# EAGLE board Brine BRD v89 (EAGLE 9.7.0), part 1 of 4
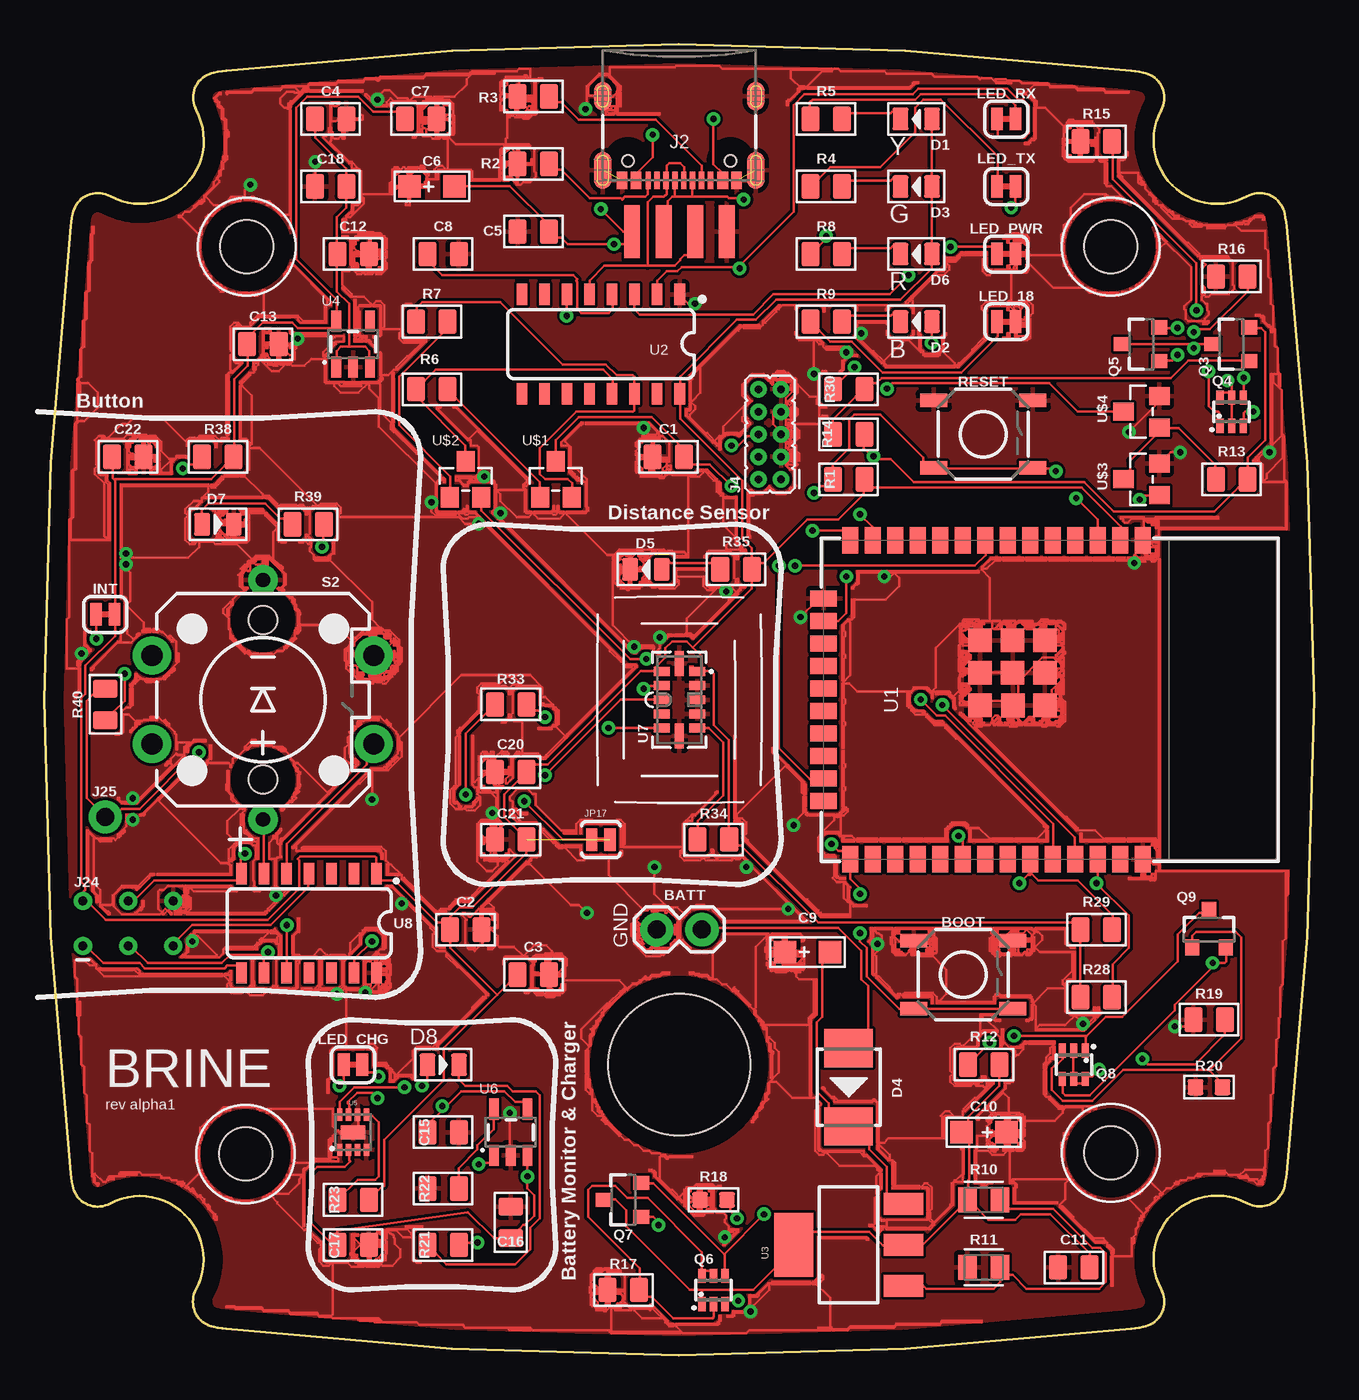
[diagram p0: board, top side]
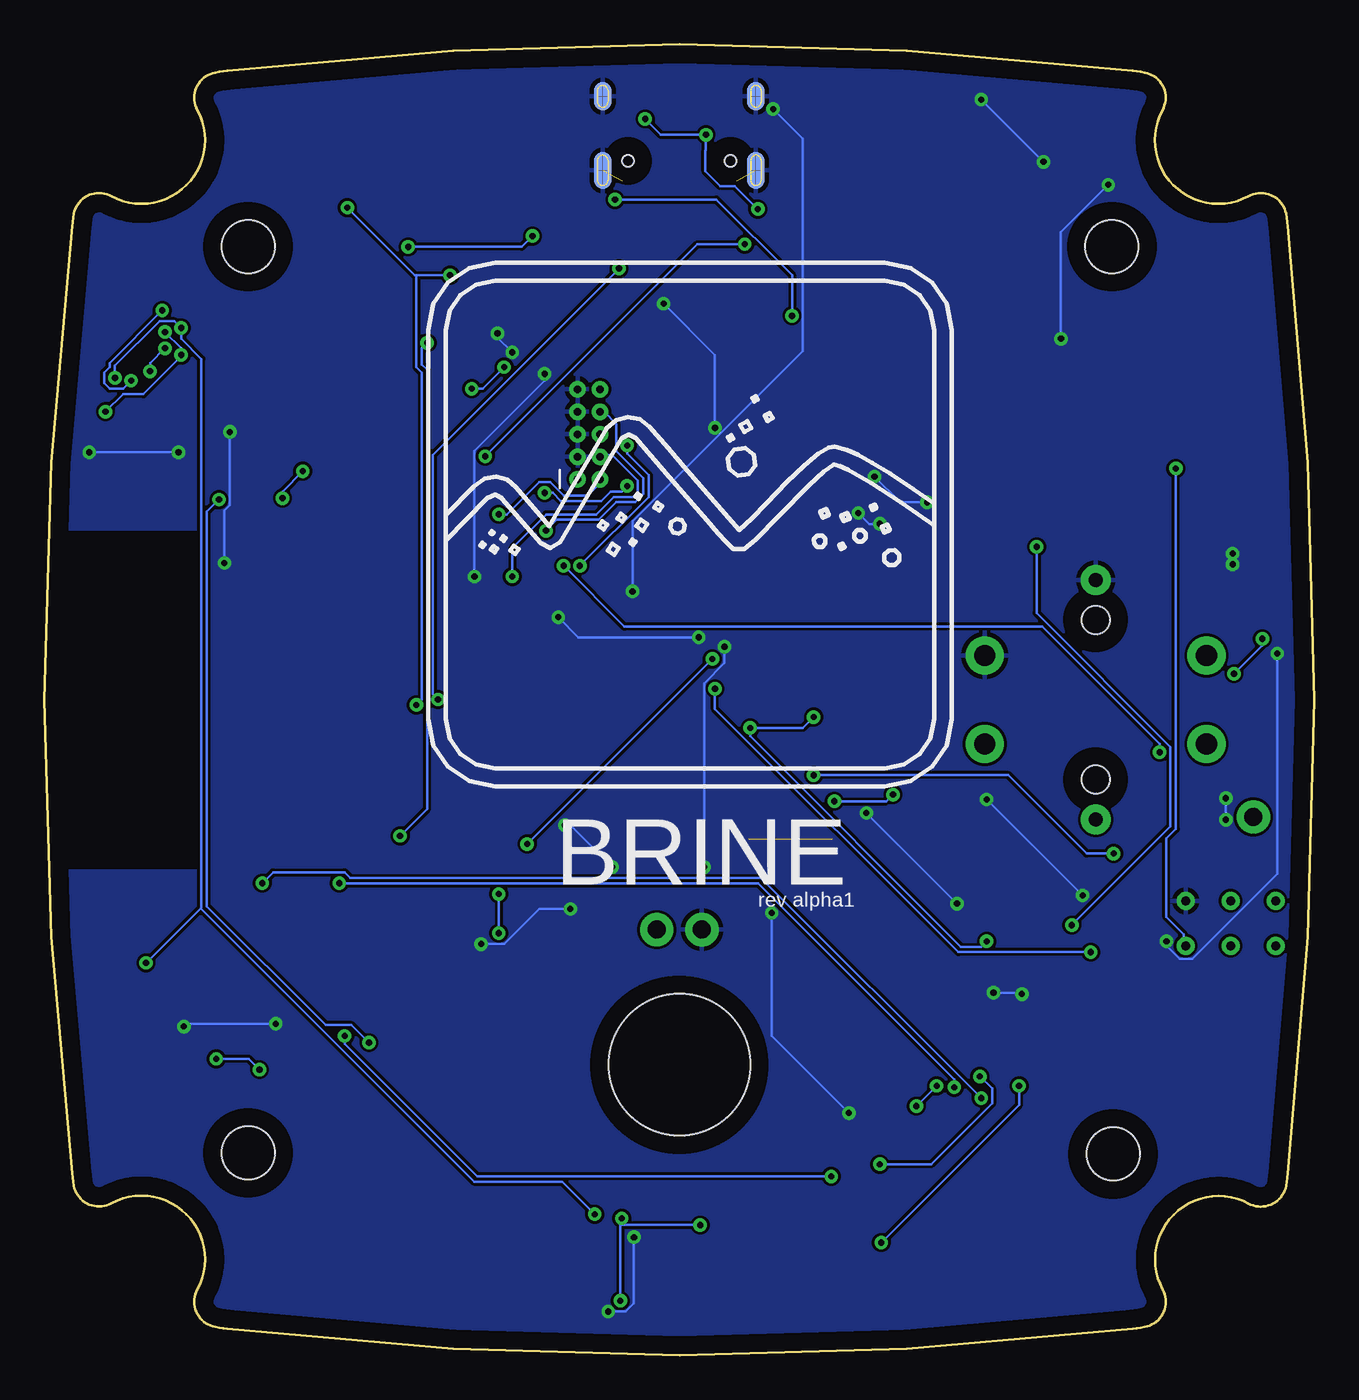
[diagram p1: board, bottom side, seen from below]

Size 71.6 x 73.93 mm. Coordinates in mm from the lower left corner, seen from the top.
Outline: 70.04,10.25 arc13 70.04,63.68 arc4 69.94,64.37 arc108 67.83,65.37 arc-147 62.97,70.23 arc108 61.97,72.34 arc4 61.28,72.44 arc13 10.25,72.44 arc4 9.56,72.34 arc108 8.56,70.23 arc-147 3.71,65.37 arc108 1.6,64.37 arc4 1.49,63.69 arc13 1.49,10.24 arc4 1.59,9.56 arc108 3.7,8.55 arc-147 8.55,3.7 arc108 9.56,1.59 arc4 10.25,1.49 arc13 61.28,1.49 arc4 61.97,1.59 arc108 62.97,3.71 arc-147 67.83,8.56 arc108 69.94,9.56 arc4 70.04,10.25
Copper layers (1*16): Top 0.035mm / dielectric 1.5mm / Bottom 0.035mm
Design rules "Fusion Electronics Design Rules": minimum track width 6mil, minimum drill 0.35mm, track to track 6mil, track to pad 6mil, pad to pad 6mil, via to via 6mil, smd to smd 6mil, copper to edge 40mil, drill to drill 6mil, minimum pad ring 10mil, minimum via ring 8mil, stop-mask expansion 4mil, vias tented up to drill 0mil, thermal gap 10mil
Holes 3 mm at 60.12,62.52 60.12,11.41 11.35,11.35 11.41,62.52
Holes 8 mm at 35.8,16.38
tRestrict: area 63,27.4 to 71.9,46.5
bRestrict: area 63,27.4 to 71.9,46.5

## Footprints (pad centres in the part's own frame; a part is rotated, then mirrored left to right if it is on the bottom)
1X02 = drill 1.016 pad 1.88: 1 0,0; 2 2.54,0
TACTILE_SWITCH_SMD_5.2MM = smd 1.524 x 0.762: 1 -2.794,1.905; 2 2.794,1.905; 3 -2.794,-1.905; 4 2.794,-1.905
C0805 = smd 1.397 x 1.016: 1 0,0.889; 2 0,-0.889
AVX-A = smd 1.27 x 1.27: + -1.27,0; - 1.27,0
LED-0805 = smd 0.889 x 1.27: + -0.889,0; - 0.889,0
DO-214AA = smd 2.159 x 2.743: + -2.21,0; - 2.21,0
SMT-JUMPER_2_NC_TRACE_SILK = smd 0.66 x 1.27: 1 -0.521,0; 2 0.521,0
USB-C-16P-4LAYER-ISOLATED = smd 0.3 x 1: A5 -1.25,-0.34; A6 -0.25,-0.34; A7 0.25,-0.34; A8 1.25,-0.34; B5 1.75,-0.34; B6 0.75,-0.34; B7 -0.75,-0.34; B8 -1.75,-0.34 | smd 0.6 x 1: GND -3.225,-0.34; GND2 3.225,-0.34; VBUS1 -2.45,-0.34; VBUS2 2.45,-0.34 | smd 1 x 2.1: SHLD1 -4.32,-0.915; SHLD2 4.32,-0.915 | smd 1 x 2.1 bottom: SHLD3 -4.32,-0.915; SHLD4 4.32,-0.915 | smd 1 x 1.6: SHLD5 -4.32,-5.095; SHLD8 4.32,-5.095 | smd 1 x 1.6 bottom: SHLD6 -4.32,-5.095; SHLD7 4.32,-5.095 | hole 0.65: -2.89,-1.445; 2.89,-1.445
USB-SOLDER-PADS = smd 3 x 0.9: D+ 0,-0.889; D- 0,0.889; GND 0,-2.667; VBUS 0,2.667
2X5_PTH_SILK_.05 = drill 0.432: 1 0,0; 2 0,1.27; 3 1.27,0; 4 1.27,1.27; 5 2.54,0; 6 2.54,1.27; 7 3.81,0; 8 3.81,1.27; 9 5.08,0; 10 5.08,1.27
2X3_TEST_POINTS = drill 0.508: 1 -2.54,-1.27; 2 -2.54,1.27; 3 0,-1.27; 4 0,1.27; 5 2.54,-1.27; 6 2.54,1.27
1X01_NO_SILK = drill 1.016 pad 1.88: 1 0,0
PAD-JUMPER-2-NC_BY_TRACE_YES_SILK = smd 0.635 x 1.27: 1 -0.508,0; 2 0.508,0
SOT23-3 = smd 0.8 x 0.9: 1 -0.95,-1; 2 0.95,-1; 3 0,1.1
SOT363_PHILIPS = smd 0.4 x 0.8: 1 -0.65,-0.8; 2 0,-0.8; 3 0.65,-0.8; 4 0.65,0.8; 5 0,0.8; 6 -0.65,0.8
R0805 = smd 1.397 x 1.016: 1 0,0.889; 2 0,-0.889
RESC2012X65 = smd 1.031 x 1.42: 1 -0.919,0; 2 0.919,0
R0603 = smd 0.889 x 0.889: 1 0,0.762; 2 0,-0.762
TACTILE_SWITCH_LED_PTH_12MM = drill 1.2 pad 2.159: 1 -6.25,2.5; 2 6.25,2.5; 3 -6.25,-2.5; 4 6.25,-2.5 | drill 0.8 pad 1.676: A 0,-6.75; C 0,6.75 | hole 1.6: 0,4.5; 0,-4.5
ESP-WROOM-32D = smd 0.9 x 1.5: 1 6.43,9; 2 5.16,9; 3 3.89,9; 4 2.62,9; 5 1.35,9; 6 0.08,9; 7 -1.19,9; 8 -2.46,9; 9 -3.73,9; 10 -5,9; 11 -6.27,9; 12 -7.54,9; 13 -8.81,9; 14 -10.08,9; 25 -10.08,-9; 26 -8.81,-9; 27 -7.54,-9; 28 -6.27,-9; 29 -5,-9; 30 -3.73,-9; 31 -2.46,-9; 32 -1.19,-9; 33 0.08,-9; 34 1.35,-9; 35 2.62,-9; 36 3.89,-9; 37 5.16,-9; 38 6.43,-9 | smd 1.5 x 0.9: 15 -11.57,5.715; 16 -11.57,4.445; 17 -11.57,3.175; 18 -11.57,1.905; 19 -11.57,0.635; 20 -11.57,-0.635; 21 -11.57,-1.905; 22 -11.57,-3.175; 23 -11.57,-4.445; 24 -11.57,-5.715 | smd 1.33 x 1.33: GND -0.912,1.531; GNDT1 -2.751,3.346; GNDT2 -2.761,1.516; GNDT3 -2.751,-0.314; GNDT4 -0.891,-0.324; GNDT5 0.909,-0.314; GNDT6 0.909,1.516; GNDT7 0.909,3.346; GNDT8 -0.921,3.346
SO016 = smd 0.6 x 1.2: 1 -4.445,-2.8; 2 -3.175,-2.8; 3 -1.905,-2.8; 4 -0.635,-2.8; 5 0.635,-2.8; 6 1.905,-2.8; 7 3.175,-2.8; 8 4.445,-2.8; 9 4.445,2.8; 10 3.175,2.8; 11 1.905,2.8; 12 0.635,2.8; 13 -0.635,2.8; 14 -1.905,2.8; 15 -3.175,2.8; 16 -4.445,2.8
SOT223 = smd 1.219 x 2.235: 1 -2.311,-3.099; 2 0,-3.099; 3 2.311,-3.099 | smd 3.6 x 2.2: 4 0,3.099
SOT23-5 = smd 0.55 x 1.2: 1 -0.95,-1.3; 2 0,-1.3; 3 0.95,-1.3; 4 0.95,1.3; 5 -0.95,1.3
DFN-8 = smd 0.3 x 0.7: 1 -0.75,-0.99; 2 -0.25,-0.99; 3 0.25,-0.99; 4 0.75,-0.99; 5 0.75,0.99; 6 0.25,0.99; 7 -0.25,0.99; 8 -0.75,0.99 | smd 1.38 x 0.8: 9 0,0
VL53L1X = smd 0.5 x 0.9: 1 1.6,-1; 2 0.8,-1; 3 0,-1; 4 -0.8,-1; 5 -1.6,-1; 7 -1.6,1; 8 -0.8,1; 9 0,1; 10 0.8,1; 11 1.6,1 | smd 1.4 x 0.5: 6 -2.05,0; 12 2.05,0
SO14 = smd 0.6 x 1.2: 1 -3.81,-2.8; 2 -2.54,-2.8; 3 -1.27,-2.8; 4 0,-2.8; 5 1.27,-2.8; 6 2.54,-2.8; 7 3.81,-2.8; 8 3.81,2.8; 9 2.54,2.8; 10 1.27,2.8; 11 0,2.8; 12 -1.27,2.8; 13 -2.54,2.8; 14 -3.81,2.8
SOT-23 = smd 1.016 x 1.143: 1 -0.889,-1.016; 2 0.889,-1.016; 3 0,1.016

## Placement (x,y rotation side)
BATT  [1X02]  34.53,24 0 top
BOOT  GPIO0  [TACTILE_SWITCH_SMD_5.2MM]  51.81,21.46 0 top
C1  100nf  [C0805]  35.19,50.67 270 top
C2  100nf  [C0805]  23.76,24 90 top
C3  100nf  [C0805]  27.57,21.46 90 top
C4  100nf  [C0805]  16.14,69.72 90 top
C5  0.1uF  [C0805]  27.57,63.37 270 top
C6  10uF  [AVX-A]  21.85,65.91 0 top
C7  0.1uF  [C0805]  21.22,69.72 90 top
C8  10nF  [C0805]  22.49,62.1 90 top
C9  47uf  [AVX-A]  43.04,22.73 0 top
C10  10uf  [AVX-A]  52.97,12.57 180 top
C11  100nf  [C0805]  58.05,4.95 270 top
C12  100nf  [C0805]  17.41,62.1 90 top
C13  100nf  [C0805]  12.33,57.02 90 top
C15  4.7uf  [C0805]  22.49,12.57 90 top
C16  4.7uf  [C0805]  26.3,7.49 180 top
C17  0.1UF  [C0805]  17.41,6.22 90 top
C18  100nf  [C0805]  16.14,65.91 270 top
C20  0.1uF  [C0805]  26.3,32.89 270 top
C21  4.7uF  [C0805]  26.3,29.08 270 top
C22  100nF  [C0805]  4.71,50.67 90 top
D1  YELLOW-0805  [LED-0805]  49.16,69.72 180 top
D2  CLEAR-BLUE-0805  [LED-0805]  49.16,58.29 180 top
D3  GREEN-0805  [LED-0805]  49.16,65.91 180 top
D4  28V-5A  [DO-214AA]  45.35,15.11 270 top
D5  RED-0805  [LED-0805]  33.92,44.32 180 top
D6  RED-0805  [LED-0805]  49.16,62.1 180 top
D7  RED-0805  [LED-0805]  9.79,46.86 0 top
D8  YELLOW-0805  [LED-0805]  22.49,16.38 0 top
INT  JUMPER-SMT_2_NC_TRACE_SILK  [SMT-JUMPER_2_NC_TRACE_SILK]  3.44,41.78 0 top
J2  USB-C  [USB-C-16P-4LAYER-ISOLATED]  35.8,65.91 180 top
J3  USB_SOLDER_PADS  [USB-SOLDER-PADS]  35.8,63.37 90 top
J4  [2X5_PTH_SILK_.05]  41.54,49.4 90 top
J24  ISP  [2X3_TEST_POINTS]  4.72,24.36 0 top
J25  [1X01_NO_SILK]  3.44,30.35 270 top
JP17  INT  [PAD-JUMPER-2-NC_BY_TRACE_YES_SILK]  31.38,29.08 0 top
LED_18  JUMPER-SMT_2_NC_TRACE_SILK  [SMT-JUMPER_2_NC_TRACE_SILK]  54.24,58.29 0 top
LED_CHG  JUMPER-SMT_2_NC_TRACE_SILK  [SMT-JUMPER_2_NC_TRACE_SILK]  17.41,16.38 0 top
LED_PWR  JUMPER-SMT_2_NC_TRACE_SILK  [SMT-JUMPER_2_NC_TRACE_SILK]  54.24,62.1 0 top
LED_RX  JUMPER-SMT_2_NC_TRACE_SILK  [SMT-JUMPER_2_NC_TRACE_SILK]  54.24,69.72 0 top
LED_TX  JUMPER-SMT_2_NC_TRACE_SILK  [SMT-JUMPER_2_NC_TRACE_SILK]  54.24,65.91 180 top
Q3  20V/4.2A/52mΩ/1.4W  [SOT23-3]  66.94,57.02 90 top
Q4  [SOT363_PHILIPS]  66.94,53.21 0 top
Q5  20V/4.2A/52mΩ/1.4W  [SOT23-3]  61.86,57.02 90 top
Q6  [SOT363_PHILIPS]  37.73,3.68 0 top
Q7  20V/4.2A/52mΩ/1.4W  [SOT23-3]  32.65,8.76 90 top
Q8  [SOT363_PHILIPS]  58.05,16.38 180 top
Q9  20V/4.2A/52mΩ/1.4W  [SOT23-3]  65.67,24 0 top
R1  10K  [R0805]  45.35,49.4 90 top
R2  1K  [R0805]  27.57,67.18 90 top
R3  1K  [R0805]  27.57,70.99 90 top
R4  1K  [R0805]  44.08,65.91 90 top
R5  1K  [R0805]  44.08,69.72 90 top
R6  10K  [R0805]  21.85,54.48 90 top
R7  10K  [R0805]  21.85,58.29 90 top
R8  2.2K  [R0805]  44.08,62.1 90 top
R9  4.7K  [R0805]  44.08,58.29 90 top
R10  240  [RESC2012X65]  52.97,8.76 180 top
R11  715  [RESC2012X65]  52.97,4.95 0 top
R12  10K  [R0805]  52.97,16.38 270 top
R13  10K  [R0805]  66.94,49.4 90 top
R14  10K  [R0805]  45.35,51.94 270 top
R15  10K  [R0805]  59.32,68.45 90 top
R16  1K  [R0805]  66.94,60.83 90 top
R17  1K  [R0805]  32.65,3.68 90 top
R18  1M  [R0603]  37.73,8.76 90 top
R19  1K  [R0805]  65.67,18.92 90 top
R20  1M  [R0603]  65.67,15.11 90 top
R21  1K  [R0805]  22.49,6.22 90 top
R22  2K  [R0805]  22.49,9.4 90 top
R23  10K  [R0805]  17.41,8.76 90 top
R28  2.2K  [R0805]  59.32,20.19 270 top
R29  1K  [R0805]  59.32,24 270 top
R30  100R  [R0805]  45.35,54.48 90 top
R33  10K  [R0805]  26.3,36.7 270 top
R34  10K  [R0805]  37.73,29.08 90 top
R35  1K  [R0805]  39,44.32 90 top
R38  10K  [R0805]  9.79,50.67 90 top
R39  1K  [R0805]  14.87,46.86 90 top
R40  10K  [R0805]  3.44,36.7 0 top
RESET  Reset  [TACTILE_SWITCH_SMD_5.2MM]  52.94,51.94 0 top
S2  Button  [TACTILE_SWITCH_LED_PTH_12MM]  12.33,36.97 0 top
U1  ESP-WROOM-3232D  [ESP-WROOM-32D]  55.51,36.97 0 top
U2  CH340C  [SO016]  31.38,57.02 180 top
U3  LM1117  [SOT223]  45.35,6.22 90 top
U4  XC6222B331MR-G  [SOT23-5]  17.41,57.02 0 top
U5  MAX17048  [DFN-8]  17.41,12.57 0 top
U6  MCP73831  [SOT23-5]  26.3,12.57 0 top
U7  VL53L1X  [VL53L1X]  35.8,36.97 90 top
U8  ATTINY84-ARDUINO  [SO14]  14.93,24.36 180 top
U$1  MMBT3904LT1G  [SOT-23]  28.84,49.4 0 top
U$2  MMBT3904LT1G  [SOT-23]  23.76,49.4 0 top
U$3  MMBT3904LT1G  [SOT-23]  61.86,49.4 90 top
U$4  MMBT3904LT1G  [SOT-23]  61.86,53.21 90 top

## Library data of the parts
BATT J3 J4 J24 J25 = SparkFun-Connectors
BOOT RESET = SparkFun-Switches; PROD_ID: SWCH-14139
C1-C4 C11-C13 C18 = OPL_Capacitor; MPN: CC0805KRX7R9BB104
C5 C7 C17 C20 C22 = OPL_Capacitor; MPN: CC0805KRX7R9BB104; VALUE: 100nf
C6 = OPL_Capacitor; MPN: TAJA106K010RNJ; VALUE: 10uf
C8 = OPL_Capacitor; MPN: CC0805JRX7R9BB103; VALUE: 10nf
C9 = OPL_Capacitor; MPN: TAJA476*006#NJ
C10 = OPL_Capacitor; MPN: TAJA106K016RNJ
C15 C16 = OPL_Capacitor; MPN: CC0805KKX5R8BB475
C21 = OPL_Capacitor; MPN: CC0805KKX5R8BB475; VALUE: 4.7uf
D1 D8 = OPL_Optoelectronics; MPN: 17-215UYC/S530-A3/TR8
D2 = OPL_Optoelectronics; MPN: EL-17-215/BHC-AN1P2/3T
D3 = OPL_Optoelectronics; MPN: 17-215SYGC/S530-E2/TR8
D4 = OPL_Discrete_Semiconductor; MPN: SS54B
D5-D7 = OPL_Optoelectronics; MPN: 17-215SURC/S530-A2/TR8
INT LED_18 LED_CHG LED_PWR LED_RX LED_TX = SparkFun-Jumpers
J2 = SparkFun-Connectors; PROD_ID: CONN-14122
JP17 = SparkFun-Passives
Q3 Q5 Q7 Q9 = SparkFun-DiscreteSemi; OPL: DMG2305UX-7; PROD_ID: TRANS-14388
Q4 Q6 Q8 = SparkFun-DiscreteSemi; PROD_ID: TRANS-14386
R1 R6 R7 R12-R15 R23 R33 R34 R38 R40 = OPL_Resistor; MPN: RC0805FR-0710KL
R2-R5 R16 R17 R19 R21 R29 R35 R39 = OPL_Resistor; MPN: RC0805JR-071KL
R8 R28 = OPL_Resistor; MPN: RC0805JR-072K2L
R9 = OPL_Resistor; MPN: RC0805JR-074K7L
R10 R11 = Tutorial - Fusion 360; CATEGORY: Resistor; SUB-CATEGORY: Fixed
R18 R20 = OPL_Resistor; MPN: RC0603FR-071ML
R22 = OPL_Resistor; MPN: RC0805JR-071KL; VALUE: 1K
R30 = OPL_Resistor; MPN: RC0805JR-07100RL
S2 = SparkFun-Switches; PROD_ID: SWCH-11758; SF_SKU: COM-10442
U1 = SparkFun-RF; OPL: ESP32-WROOM-32D(16MB); PROD_ID: IC-15676
U2 = SparkFun-IC-Comms; OPL: CH340C; PROD_ID: IC-14038
U3 = SparkFun-IC-Power; OPL: LM1117GSF-5.0; PROD_ID: VREG-08170
U4 = SparkFun-IC-Power; IOUT: 700mA; OPL: XC6220B331MR-G; PROD_ID: VREG-16775; VOUT: 3.3V
U5 = SparkFun-IC-Power; PROD_ID: IC-12551
U6 = SparkFun-IC-Power; PROD_ID: IC-09995
U7 = SparkFun-Sensors; OPL: VL53L1CXV0FY/1; PROD_ID: IC-13960
U8 = SparkFun-IC-Microcontroller; OPL: ATTINY84-20SSU; PROD_ID: IC-14155
U$1-U$4 = OPL_Discrete_Semiconductor; MPN: MMBT3904LT1G; OPL: MMBT3904LT1G

## Nets
3.3V: C2.1 C3.1 C7.1 C13.1 C20.1 C21.1 C22.1 D1.+ D3.+ D6.+ INT.2 J24.2 JP17.2 R1.2 R23.2 R28.2 R29.2 R34.2 R35.2 R38.2 U1.2 U2.16 U4.5 U7.1 U7.11 U8.1
5V [power]: C4.1 C12.1 C18.1 U4.1 U4.3
5V_CHG: C15.1 D8.+ U6.4
5V_EXT [power]: C10.- C11.1 Q6.1 Q7.3 R10.2 R12.1 U3.2 U3.4
5V_MEAS: Q4.4 Q5.2 Q6.4 Q7.2 Q8.4 Q9.2
!DTR!: R6.1 U2.13 U$2.3
!GAUGE_ALERT: U1.26
!GAUGE_ALERT!: R23.1 U5.5
!INT: R33.1 U7.7 U8.13
!RST: J24.5 R38.1 U8.4
!RTS!: R7.1 U2.14 U$1.2
!SHUT: R34.1 U7.5
ADR0: U8.3
ADR1: U8.2
ADR2: U8.12
ADR3: U8.11
CC1: J2.A5 R3.2
CC2: J2.B5 R2.2
D+: J2.A6 J2.B6 J3.D+ U2.5
D-: J2.A7 J2.B7 J3.D- U2.6
ESP32_0: BOOT.3 BOOT.4 U1.25 U$2.2
ESP32_ADC0: U1.4
ESP32_ADC3: U1.5
ESP32_ADC4: J25.1 R40.1 U1.8
ESP32_ADC5: U1.9
ESP32_ADC6: U1.6
ESP32_ADC7: U1.7
ESP32_EN: C1.1 R1.1 RESET.3 RESET.4 U1.3 U$1.3
ESP32_GPIO2: U1.24
ESP32_GPIO5_!CS!: U1.29
ESP32_GPIO12_TDI: J4.8 U1.14
ESP32_GPIO13_TCK: J4.4 U1.16
ESP32_GPIO14_TMS: J4.2 U1.13
ESP32_GPIO15_TDO: J4.6 U1.23
ESP32_GPIO16: U1.27
ESP32_GPIO17: U1.28
ESP32_GPIO18_SCK: D2.+ U1.30
ESP32_GPIO19_POCI: U1.31
ESP32_GPIO23_PICO: U1.37
ESP32_GPIO25: U1.10
ESP32_GPIO26: U1.11
ESP32_GPIO27: U1.12
ESP32_RXD0: LED_RX.1 U1.34 U2.2
ESP32_SCL: R28.1 U1.36 U5.7
ESP32_SDA: R29.1 U1.33 U5.8
ESP32_TXD0: LED_TX.1 U1.35 U2.3
GND: BATT.1 BOOT.1 BOOT.2 C1.2 C2.2 C3.2 C4.2 C5.2 C6.+ C7.2 C8.2 C9.+ C10.+ C11.2 C12.2 C13.2 C15.2 C16.2 C17.2 C18.2 C20.2 C21.2 C22.2 D5.- D7.- J2.GND J2.GND2 J2.SHLD1 J2.SHLD2 J2.SHLD3 J2.SHLD4 J2.SHLD5 J2.SHLD6 J2.SHLD7 J2.SHLD8 J3.GND J4.3 J4.5 J4.7 J4.9 J24.6 LED_18.2 LED_PWR.2 R2.1 R3.1 R11.1 R15.1 R16.1 R17.1 R18.1 R19.1 R20.1 R22.1 RESET.1 RESET.2 S2.2 S2.C U1.1 U1.15 U1.38 U1.GND U1.GNDT1 U1.GNDT2 U1.GNDT3 U1.GNDT4 U1.GNDT5 U1.GNDT6 U1.GNDT7 U1.GNDT8 U2.1 U4.2 U5.1 U5.4 U5.6 U5.9 U6.2 U7.2 U7.3 U7.4 U7.6 U7.12 U8.14 U$3.2 U$4.2
INT_R: INT.1 R40.2
LED: S2.A U8.6
MISO: J24.1 U8.8
N$1: BATT.2 D4.+
N$2: D6.- R8.2
N$3: D2.- R9.2
N$4: LED_18.1 R9.1
N$5: D3.- R4.2
N$6: C8.1 U2.4
N$7: D1.- R5.2
N$8: Q6.2 Q6.5 Q6.6 R17.2
N$9: Q3.1 R14.2 R30.2
N$10: Q6.3 Q7.1 R18.2
N$11: R30.1 U$4.3
N$12: Q4.2 Q4.5 Q4.6 R15.2
N$13: Q8.2 Q8.5 Q8.6 R19.2
N$14: LED_PWR.1 R8.1
N$15: R10.1 R11.2 U3.1
N$16: Q4.3 Q5.1 R16.2
N$17: Q8.3 Q9.1 R20.2
N$18: R6.2 U$1.1
N$19: R12.2 U$3.1
N$20: R7.2 U$2.1
N$21: R22.2 U6.5
N$22: R13.1 U$3.3 U$4.1
N$23: D5.+ R35.1
N$24: LED_CHG.2 U6.1
N$25: LED_CHG.1 R21.2
N$26: D8.- R21.1
N$30: LED_TX.2 R4.1
N$31: LED_RX.2 R5.1
N$38: JP17.1 R33.2
N$40: D7.+ R39.1
SCL: J24.3 U7.10 U8.9
SDA: J24.4 U7.9 U8.7
STAT: R39.2 U8.10
SWITCH: S2.4 U8.5
V_BATT: C16.1 C17.1 Q8.1 Q9.3 U5.2 U5.3 U6.3
V_USB: C5.1 C6.- J2.VBUS1 J2.VBUS2 J3.VBUS Q3.2 R13.2 R14.1
VIN [power]: C9.- D4.- U3.3
VUSB_PROT: Q3.3 Q4.1 Q5.3

## Tracks (layer width: path | path; a pad name or v marks a point on that pad's centre or on a via)
3.3V  (1 unrouted)
  Top 0.152: 4,41.78 4,49.33 3.96,49.36 | 3.96,49.36 3.84,49.48 3.84,50.62 C22.1 | 4,41.78 4,40.56 2.32,38.89 2.32,37.29 2.09,37.06 2.09,26.69 2.32,26.47 2.32,26.24 2.17,26.08 2.17,25.7 J24.2 2.24,25.63 2.4,25.63 3.46,24.56 12.61,24.56 14.28,26.24 14.28,26.31 14.36,26.39 14.36,27.91 14.28,27.99 14.44,28.14 18.63,28.14 18.7,28.07 18.7,27.23 U8.1 18.7,27.15 18.7,26.77 19.77,26.77 22.13,24.41 22.89,24.41 | 4,41.78 INT.2 | 11.46,57.02 11.46,57.4 12.3,58.24 13.98,58.24 14.28,57.94 16.49,57.94 16.49,58.32 U4.5 16.49,58.39 16.49,59.54 14.21,61.82 14.21,70.36 14.82,70.97 17.71,70.97 18.55,70.13 20.3,70.13 20.3,69.75 C7.1 | 11.46,57.02 11.46,55.8 10.7,55.04 10.7,50.7 R38.2 10.7,50.62 10.7,50.16 10.17,50.16 9.41,49.4 4,49.4 3.96,49.36 | 11.46,57.02 C13.1 | D1.+ 50.02,69.67 50.02,65.94 D3.+ 50.02,65.86 50.02,62.13 D6.+ 50.02,62.05 50.02,61.29 48.27,59.54 41.26,59.54 40.12,58.39 39.05,58.39 35.85,55.19 35.85,54.28 U2.16 35.85,54.2 35.85,52.83 39.35,49.33 39.35,46.05 39.89,45.52 39.89,44.68 | R35.2 39.89,44.68 | 46.21,48.94 46.21,48.56 44.76,47.12 43.01,47.12 40.57,44.68 39.89,44.68 | 46.21,48.94 46.21,49.4 R1.2 46.21,48.94 | 39.89,44.37 R35.2 | 46.21,48.94 58.48,48.94 60.69,46.73 60.69,45.97 U1.2 | 22.89,24.41 22.89,24.03 C2.1 | 22.89,24.41 22.89,24.71 23.43,25.25 24.11,25.25 27.16,28.29 27.16,29.06 C21.1 25.92,30.35 25.92,31.62 C20.1 27.16,32.94 27.16,33.32 28.38,33.32 33.64,38.58 34.48,38.58 | 22.89,24.41 C2.1 | R23.2 19.12,9.59 19.16,9.55 19.16,12.14 22.51,15.49 22.51,17.32 25.52,20.33 | 25.52,20.33 26.17,20.98 26.7,20.98 26.7,21.44 C3.1 | 25.52,20.33 22.89,22.96 22.89,23.95 C2.1
  Top 0.152: R28.2 58.4,20.22 58.4,23.95 R29.2 58.4,24.03 58.4,24.41 43.62,24.41 39.28,28.75 38.59,28.75 38.59,29.06 R34.2 38.59,29.13 38.59,34.69 37.75,35.53 37.75,38.43 37.6,38.58 37.07,38.58 | 34.48,38.58 34.78,38.58 U7.11 34.48,38.58 | 34.48,38.58 34.48,38.81 35.01,39.34 35.01,39.88 35.39,40.26 36.23,40.26 36.57,39.91 | 36.57,39.91 37.07,39.42 37.07,38.58 | 37.07,38.58 36.84,38.58 U7.1 37.07,38.58 | R35.2 39.89,43.23 36.57,39.91
5V
  Top 0.152: 17.18,56.87 18.09,56.87 18.32,56.64 18.32,55.73 U4.3 | 17.18,56.87 16.72,56.87 16.49,56.64 16.49,55.73 U4.1 | C4.1 15.27,69.67 15.27,68.68 17.03,66.93 C18.1 17.03,64.72 16.49,64.18 16.49,62.13 C12.1 16.49,62.05 16.49,59.99 17.18,59.31 17.18,56.87
5V_CHG  (via drill 0.35)
  Top 0.152: 22.55,13.93 21.6,12.98 C15.1 | 22.55,13.93 23.5,14.88 25.94,14.88 26.55,14.27 27.24,14.27 27.24,13.89 U6.4 | D8.+ 21.6,15.42 21.37,15.19 v21.29,15.19 | 22.55,13.93 v22.44,14.04
  Bottom 0.152: v22.44,14.04 v21.29,15.19
5V_EXT
  Top 0.152: 37.11,3.64 37.14,3.68 39.96,3.68 41.26,4.98 42.17,4.98 42.25,5.05 42.25,6.2 U3.4 42.25,6.27 42.25,6.96 46.52,6.96 47.28,6.2 48.42,6.2 U3.2 48.5,6.2 49.49,6.2 51.55,8.25 52.08,8.25 52.15,8.33 | 37.11,3.64 37.07,3.61 37.07,2.92 Q6.1 | Q7.3 31.58,8.79 32.19,8.79 32.8,8.18 32.8,7.26 36.38,3.68 37.07,3.68 37.11,3.64 | 52.08,12.6 52.15,12.6 52.15,9.93 52.08,9.85 52.08,8.79 R10.2 | 52.08,12.6 51.7,12.6 C10.- 52.08,12.6 | C11.1 58.94,5.74 56.73,7.95 55.05,7.95 54.75,7.64 53.22,7.64 52.54,8.33 52.15,8.33 | 52.15,8.33 52.08,8.33 52.08,8.71 R10.2 | 52.08,12.6 52.08,13.44 53.83,15.19 53.83,16.33 R12.1 | 52.15,8.33 R10.2
5V_MEAS  (via drill 0.35)
  Top 0.152: 38.32,5.7 34.32,9.7 33.71,9.7 Q7.2 | 38.32,5.7 38.36,5.66 38.36,4.52 Q6.4 | v67.62,55.12 67.62,54.05 Q4.4 | v63.89,57.94 62.9,57.94 Q5.2 | 65.98,22.01 66.1,22.12 66.56,22.12 66.63,22.2 66.63,22.96 Q9.2 | 65.98,22.01 63.74,19.76 63.74,19.45 58.94,14.65 57.56,14.65 57.41,14.81 57.41,15.57 Q8.4 | 65.98,22.01 v65.87,22.12 | v40.57,7.95 38.32,5.7
  Bottom 0.152: v67.62,55.12 67.62,55.8 65.11,58.32 64.27,58.32 v63.89,57.94 63.89,57.33 62.75,56.18 62.75,25.25 62.78,25.21 | v65.87,22.12 62.78,25.21 | v40.57,7.95 42.4,9.78 47.35,9.78 62.78,25.21
!DTR!
  Top 0.152: U$2.3 23.73,50.47 23.73,51.31 20.99,54.05 20.99,54.43 R6.1 20.99,54.51 20.99,54.96 21.45,54.96 22.06,55.57 31.5,55.57 32.04,55.04 32.04,54.28 U2.13
!GAUGE_ALERT!
  Top 0.152: U5.5 18.17,13.51 18.47,13.51 18.86,13.13 18.86,10.08 18.65,9.88 17.67,9.88 R23.1
!INT  (via drill 0.35)
  Top 0.152: v31.81,35.38 34.78,35.38 U7.7 | v28.23,35.99 27.85,36.37 27.16,36.37 27.16,36.68 R33.1 | v18.47,23.34 17.48,22.35 17.48,21.59 U8.13
  Bottom 0.152: v28.23,35.99 28.84,35.38 v31.81,35.38 31.81,34.92 19.92,23.04 18.78,23.04 v18.47,23.34
!RST  (via drill 0.35)
  Top 0.152: U8.4 14.89,27.15 14.89,26.39 12.76,24.26 8.34,24.26 7.2,23.11 J24.5 | v7.81,50.01 8.03,50.24 8.87,50.24 8.87,50.62 R38.1
  Bottom 0.152: v7.81,50.01 7.81,29.67 8.34,29.13 8.34,24.71 7.35,23.72 7.35,23.19 7.27,23.11 J24.5
!RTS!
  Top 0.152: U$1.2 29.75,48.41 29.75,49.17 29.52,49.4 28.23,49.4 27.92,49.71 27.92,51.15 29.98,53.21 33.18,53.21 33.26,53.29 33.26,54.2 U2.14 33.26,54.28 33.26,55.19 33.18,55.27 32.27,55.27 31.66,55.88 29.22,55.88 25.71,59.38 21.29,59.38 20.99,59.08 20.99,58.32 R7.1
!SHUT
  Top 0.152: R34.1 36.84,30.12 38.29,31.57 38.29,34.54 37.45,35.38 36.84,35.38 U7.5
CC1
  Top 0.152: R3.2 28.46,70.66 29.14,70.66 30.13,69.67 34.48,69.67 37.07,67.08 37.07,66.32 J2.A5
CC2
  Top 0.152: R2.2 28.46,66.85 29.14,66.85 30.74,65.25 32.5,65.25 32.57,65.17 32.72,65.33 33.87,65.33 34.02,65.48 34.02,66.24 J2.B5
D+
  Top 0.152: J2.A6 36.08,66.32 36.08,67 35.85,67.23 35.24,67.23 35.09,67.08 35.09,66.32 J2.B6 35.09,66.24 35.09,65.48 34.93,65.33 34.32,65.33 34.02,65.02 34.02,61.44 | U2.5 30.74,60.6 31.58,61.44 34.02,61.44 | 34.02,61.44 35.54,61.44 35.85,61.75 35.85,61.82 36.08,62.05 36.53,62.05 36.69,62.2 36.69,63.35 J3.D+
D-  (via drill 0.35)
  Top 0.152: 35.51,65.37 35.47,65.33 35.39,65.33 35.16,65.1 35.16,64.79 34.93,64.57 34.93,63.42 J3.D- | 35.51,65.37 35.54,65.4 J2.A7 | 36.5,65.37 36.46,65.33 35.54,65.33 35.51,65.37 | 36.5,65.37 36.53,65.4 36.53,66.24 J2.B7 | v29.45,58.62 29.45,59.76 U2.6 | v39.43,65.17 39.35,65.17 39.28,65.25 38.59,65.25 38.51,65.33 36.53,65.33 36.5,65.37
  Bottom 0.152: v29.45,58.62 29.45,60.91 33.71,65.17 v39.43,65.17
ESP32_0  (via drill 0.35)
  Top 0.152: BOOT.4 54.59,19.53 49.03,19.53 BOOT.3 48.95,19.53 48.19,19.53 46.36,21.36 46.36,22.96 45.98,23.34 v45.98,23.8 | U$2.2 24.65,47.65 33.03,39.27 v33.94,39.27 | v44.38,28.83 44.76,28.45 45.45,28.45 45.45,27.99 U1.25 45.45,27.91 45.45,26.85 45.98,26.31 v45.98,26.01
  Bottom 0.152: v44.38,28.83 v33.94,39.27 | v45.98,26.01 v45.98,23.8
ESP32_ADC4  (via drill 0.35)
  Top 0.152: R40.1 2.85,37.59 2.85,37.36 2.4,36.9 2.4,31.42 3.46,30.35 J25.1 3.46,30.43 4,30.43 4.38,30.81 5.37,30.81 8.57,34.01 v8.72,34.01 | v42.32,44.52 52.46,44.52 53.07,45.13 53.07,45.9 U1.8
  Bottom 0.152: v42.32,44.52 38.9,41.1 15.35,41.1 8.72,34.47 v8.72,34.01
ESP32_EN  (via drill 0.35)
  Top 0.152: U$1.3 28.84,51.61 30.13,52.91 34.25,52.91 36.08,51.08 C1.1 36.08,50.24 37.52,50.24 v38.74,49.02 | v58.17,48.33 59.39,47.12 U1.3 | v57.03,49.86 56.88,50.01 55.74,50.01 RESET.4 55.66,50.01 50.17,50.01 RESET.3 50.1,50.01 49.56,50.01 49.56,50.62 47.13,53.06 45.68,53.06 45.37,52.75 45.37,51.15 44.46,50.24 R1.1 44.46,49.02 43.77,49.02 v43.39,48.64
  Bottom 0.152: v58.17,48.33 58.17,48.72 v57.03,49.86 | v38.74,49.02 39.05,48.72 39.66,48.72 40.19,48.18 42.48,48.18 42.93,48.64 v43.39,48.64
ESP32_GPIO12_TDI  (via drill 0.35)
  Top 0.152: v43.32,46.51 45.45,46.51 45.45,45.97 U1.14
  Bottom 0.152: v43.32,46.51 42.71,47.12 40.34,47.12 39.35,48.11 38.29,48.11 37.83,48.56 37.83,49.48 39.35,51 39.35,52.53 40.04,53.21 J4.8
ESP32_GPIO13_TCK  (via drill 0.35)
  Top 0.152: v45.22,43.92 45.22,41.86 44.76,41.4 44,41.4 U1.16
  Bottom 0.152: v45.22,43.92 45.22,45.52 43.32,47.42 40.5,47.42 39.51,48.41 38.44,48.41 38.13,48.72 38.13,49.33 39.58,50.77 40.19,50.77 40.27,50.7 J4.4
ESP32_GPIO14_TMS  (via drill 0.35)
  Top 0.152: v45.98,47.42 46.67,46.73 46.67,45.97 U1.13
  Bottom 0.152: v45.98,47.42 45.53,47.42 43.7,49.25 43.09,49.25 42.32,48.49 40.95,48.49 40.27,49.17 J4.2
ESP32_GPIO15_TDO  (via drill 0.35)
  Top 0.152: v41.41,44.52 41.41,34.24 43.16,32.49 43.93,32.49 U1.23 | v38.74,51.31 39.12,51.31 39.66,51.84 40.19,51.84 40.27,51.92 J4.6
  Bottom 0.152: v41.41,44.52 37.52,48.41 37.52,49.63 38.74,50.85 v38.74,51.31
ESP32_GPIO18_SCK  (via drill 0.35)
  Top 0.152: v50.02,57.1 50.02,58.24 D2.+ | v51.55,29.28 51.77,29.06 51.77,27.99 U1.30
  Bottom 0.152: v50.02,57.1 50.33,56.79 50.33,55.88 50.02,55.57 50.02,30.81 v51.55,29.28
ESP32_RXD0  (via drill 0.35)
  Top 0.152: U2.2 34.55,60.6 35.09,61.14 35.7,61.14 35.92,61.36 39.12,61.36 39.16,61.4 | 39.16,61.4 42.25,64.49 42.25,70.51 42.86,71.12 48.95,71.12 49.26,71.42 54.29,71.42 54.9,70.81 55.2,70.81 55.51,70.51 55.51,68.91 55.28,68.68 53.83,68.68 53.75,68.76 53.75,69.67 LED_RX.1 | v49.41,36.98 50.33,36.07 50.78,36.07 56.88,29.97 56.88,27.99 U1.34 | v39.2,61.29 39.2,61.36 39.16,61.4
  Bottom 0.152: v49.41,36.98 49.72,37.29 49.72,50.77 v39.2,61.29
ESP32_SCL  (via drill 0.35)
  Top 0.152: v18.78,14.5 18.47,14.81 17.64,14.81 17.1,14.27 17.1,14.2 17.18,14.12 17.18,13.59 U5.7 | U1.36 59.39,27.91 59.39,26.85 59.32,26.77 v59.32,26.62 61.15,24.79 61.15,22.96 60.23,22.05 60.23,20.22 R28.1
  Bottom 0.152: v18.78,14.5 31.2,26.92 54.36,26.92 54.67,27.23 58.71,27.23 v59.32,26.62
ESP32_SDA  (via drill 0.35)
  Top 0.152: v20.3,15.11 17.48,15.11 16.65,14.27 16.65,13.59 U5.8 | 55.47,27.11 55.58,27.23 55.58,27.91 U1.33 | 55.47,27.11 v54.97,26.62 | R29.1 60.23,24.03 60.23,24.79 58.25,26.77 56.04,26.77 55.66,27.15 55.58,27.07 55.51,27.07 55.47,27.11
  Bottom 0.152: v20.3,15.11 20.3,15.57 31.35,26.62 v54.97,26.62
ESP32_TXD0  (via drill 0.35)
  Top 0.152: v48.73,60.91 47.66,59.84 41.11,59.84 39.96,58.7 33.56,58.7 33.26,59 33.26,59.76 U2.3 | v54.52,64.72 54.75,64.95 54.75,65.86 LED_TX.1 | v50.63,36.68 58.1,29.21 58.1,27.99 U1.35
  Bottom 0.152: 50.63,60.91 50.71,60.91 v54.52,64.72 | 50.63,60.91 v48.73,60.91 | v50.63,36.68 50.33,36.98 50.33,55.42 50.63,55.73 50.63,60.91
GND  (via drill 0.35)  (2 unrouted)
  Top 0.152: U1.GND 52.76,38.5 U1.GNDT2 | U5.6 17.71,13.51 17.71,12.52 17.48,12.52 17.48,12.6 17.41,12.6 U5.9 | v46.06,57.63 45.83,57.86 45.83,58.16 45.91,58.24 47.43,58.24 47.51,58.16 47.58,58.16 47.58,58.32 45.75,58.32 45.75,57.86 45.91,57.71 45.91,57.4 46.67,56.64 46.74,56.64 47.35,56.03 47.35,55.95 47.28,55.95 45.83,57.4 45.83,57.55 45.75,57.63 45.75,57.71 45.83,57.71 45.83,57.63 45.68,57.48 47.2,55.95 48.42,57.17 48.42,57.33 47.66,57.33 47.58,57.4 47.66,57.48 47.58,57.55 47.58,57.78 47.51,57.78 47.51,57.55 47.66,57.4 48.42,57.4 48.57,57.25 48.65,57.25 48.73,57.33 48.88,57.33 48.95,57.4 48.88,57.48 48.95,57.55 48.95,57.78 49.03,57.78 49.03,57.55 48.88,57.4 48.65,57.4 48.65,57.33 49.41,56.56 49.49,56.56 49.49,56.64 49.41,56.72 49.34,56.72 49.34,56.79 49.41,56.87 49.41,57.02 49.34,57.1 49.34,57.48 49.26,57.55 49.26,57.63 49.34,57.71 49.34,57.78 49.26,57.78 49.26,57.71 49.41,57.55 49.41,57.1 49.34,57.02 49.34,56.87 49.56,56.64 49.56,56.41 49.64,56.34 50.4,56.34 50.48,56.41 50.48,56.49 50.55,56.56 50.48,56.64 50.33,56.49 50.1,56.49 50.02,56.41 49.64,56.41 49.64,56.49 50.02,56.49 50.1,56.41 50.33,56.41 50.63,56.72 50.71,56.72 50.71,56.79 50.63,56.87 50.63,57.02 50.71,57.1 50.71,57.4 50.86,57.55 50.86,57.63 50.78,57.63 50.63,57.48 50.63,57.1 50.71,57.02 50.71,56.87 50.55,56.72 51.32,55.95 51.32,55.8 47.51,55.8 47.43,55.88 47.35,55.88 47.35,55.8 47.43,55.73 51.32,55.73 51.55,55.95 51.62,55.95 52.31,56.64 52.31,56.72 52.92,57.33 52.99,57.33 52.99,57.25 51.62,55.88 51.55,55.88 51.47,55.8 51.47,55.73 51.55,55.73 53.07,57.25 53.07,57.4 52.99,57.48 52.99,58.7 53.07,58.7 53.07,57.48 53.15,57.48 53.15,58.7 52.84,59 52.84,59.16 53.07,59.38 53.75,59.38 53.83,59.31 53.83,59.23 53.15,59.23 53.07,59.16 53.15,59.08 53.15,58.85 53.07,58.85 53.07,59.08 53.15,59.16 53.83,59.16 53.98,59.31 54.21,59.31 54.36,59.46 54.44,59.46 54.52,59.38 55.28,59.38 55.36,59.46 55.51,59.46 55.74,59.23 55.74,58.77 55.58,58.62 55.51,58.62 55.51,58.7 55.43,58.77 55.36,58.77 55.36,58.7 55.58,58.47 55.58,57.4 55.43,57.25 55.36,57.33 55.43,57.4 55.43,57.48 54.9,57.48 54.9,57.25 55.36,57.25 55.51,57.4 55.51,58.01 54.9,58.01 54.82,58.09 54.82,58.16 54.9,58.24 54.97,58.16 54.75,57.94 54.75,57.33 54.52,57.33 54.36,57.48 54.29,57.48 54.29,57.63 54.36,57.63 54.44,57.55 54.44,57.48 54.36,57.4 54.06,57.4 54.06,57.25 54.82,57.25 54.82,57.94 54.67,58.09 54.67,58.32 54.75,58.39 54.75,58.85 54.36,59.23 54.29,59.16 54.36,59.08 54.36,58.93 54.29,58.93 54.29,59.08 54.52,59.31 55.43,59.31 55.51,59.23 55.43,59.16 55.43,58.93 55.51,58.85 55.51,58.77 55.28,58.55 55.28,58.39 54.97,58.39 54.97,58.32 55.05,58.24 55.36,58.24 55.36,58.55 55.43,58.55 55.51,58.47 55.51,58.16 55.05,58.16 54.82,58.39 54.82,58.85 54.67,59 54.67,59.16 54.9,59.16 55.05,59 55.2,59.16 55.36,59.16 55.36,58.85 55.43,58.85 55.51,58.93 55.51,59.16 55.43,59.23 54.52,59.23 54.36,59.38 54.21,59.23 53.98,59.23 53.98,59.16 54.21,59.16 54.52,59.46 54.52,61.06 54.44,61.06 54.36,61.14 54.21,61.14 54.21,61.06 54.36,61.06 54.52,61.21 54.59,61.14 55.36,61.14 55.36,61.52 55.51,61.52 55.51,61.21 55.36,61.06 54.59,61.06 54.36,61.29 54.29,61.29 54.29,61.44 54.36,61.44 54.44,61.36 54.44,61.29 54.36,61.21 53.6,61.21 53.3,60.91 53.15,60.91 52.92,61.14 52.92,61.82 52.99,61.9 53.07,61.9 53.07,61.21 53.15,61.14 53.22,61.21 53.45,61.21 53.45,61.14 53.22,61.14 53.15,61.21 53.15,61.9 52.99,62.05 51.93,62.05 51.93,62.13 52.99,62.13 53.07,62.05 53.15,62.05 53.15,62.2 51.93,62.2 51.77,62.05 51.7,62.05 51.62,61.97 51.62,61.9 51.39,61.67 50.86,61.67 50.86,61.82 51.47,61.82 51.55,61.9 51.55,61.97 51.7,62.13 51.77,62.13 51.77,62.2 51.7,62.2 51.47,61.97 51.47,61.9 50.78,61.9 50.78,61.67 51.01,61.44 51.01,61.21 50.71,60.91 50.25,60.91 48.95,59.61 48.88,59.69 50.33,61.14 50.33,61.21 50.4,61.21 50.48,61.14 50.71,61.14 50.78,61.21 50.71,61.29 50.78,61.36 50.78,61.52 50.86,61.52 50.86,61.36 50.71,61.21 50.48,61.21 48.8,59.54 48.8,59.46 48.65,59.31 48.57,59.31 48.57,59.38 48.8,59.61 48.95,59.46 48.95,59.08 49.03,59.08 49.03,59 48.95,58.93 48.95,58.77 49.03,58.77 49.03,58.93 48.88,59.08 48.88,59.23 47.74,59.23 47.58,59.08 47.51,59.08 47.43,59 47.43,58.93 47.51,58.93 47.66,59.08 47.51,59.23 45.75,59.23 45.68,59.16 45.75,59.08 45.75,58.93 45.83,58.93 45.83,59.08 45.68,59.23 44.38,59.23 44.31,59.16 44.23,59.16 44.15,59.23 43.93,59.23 43.85,59.16 43.93,59.08 43.93,58.85 44,58.85 44,59.08 43.85,59.23 42.55,59.23 42.4,59.08 42.32,59.08 42.32,59 42.4,59 42.48,59.08 42.32,59.23 41.64,59.23 41.41,59 41.33,59 41.26,58.93 41.26,58.85 40.65,58.24 40.57,58.24 40.57,58.32 41.33,59.08 41.41,59.08 41.49,59.16 41.49,59.23 41.41,59.23 40.5,58.32 40.5,58.09 40.34,57.94 39.43,57.94 39.43,58.01 40.34,58.01 40.34,58.09 39.43,58.09 39.12,57.78 39.05,57.86 36.91,55.73 36.99,55.65 36.99,54.28 36.53,53.82 36.46,53.82 36.46,54.96 36.53,55.04 36.38,55.19 36.38,55.27 39.2,58.09 39.28,58.09 39.28,58.01 36.31,55.04 36.23,55.04 36.23,55.12 36.31,55.12 36.38,55.04 36.38,53.82 36.69,53.52 36.69,53.36 36.38,53.06 36.38,52.91 37.3,51.99 37.37,51.99 37.98,51.38 37.98,51.31 37.91,51.31 36.23,52.98 36.23,53.29 36.38,53.29 36.46,53.36 36.38,53.44 36.38,53.67 36.46,53.67 36.46,53.44 36.38,53.36 36.15,53.36 36.15,52.98 37.68,51.46 38.06,51.84 38.21,51.84 38.21,51.76 38.13,51.69 38.06,51.69 38.06,51.61 38.13,51.54 38.13,51.38 38.06,51.31 38.06,51.08 38.13,51.08 38.13,51.31 38.06,51.38 38.06,51.54 38.36,51.84 38.29,51.92 38.29,52.37 39.58,53.67 39.58,53.74 39.66,53.82 39.66,53.9 39.58,53.9 39.35,54.13 39.35,54.74 39.58,54.96 39.58,55.04 39.89,55.35 40.57,55.35 40.8,55.12 40.88,55.12 41.11,55.35 41.18,55.35 41.33,55.5 41.72,55.5 41.87,55.35 41.94,55.42 42.25,55.12 42.32,55.12 42.4,55.04 42.4,54.81 42.32,54.74 42.32,54.66 42.17,54.66 42.17,54.74 42.32,54.89 42.32,54.96 42.25,54.96 42.17,54.89 42.17,54.81 42.1,54.74 42.1,54.58 42.32,54.58 42.48,54.74 43.16,54.05 43.62,54.05 43.62,55.35 43.7,55.42 43.77,55.35 43.85,55.42 44.08,55.42 44.08,55.5 43.85,55.5 43.7,55.35 43.7,54.05 43.54,53.9 43.54,53.67 43.77,53.44 43.85,53.44 43.93,53.52 44.08,53.52 44.08,53.44 43.93,53.44 43.77,53.59 43.7,53.59 43.62,53.67 43.62,53.74 43.7,53.82 43.7,53.9 43.62,53.9 43.62,53.82 43.85,53.59 43.7,53.44 43.7,52.91 43.77,52.83 43.85,52.91 44.15,52.91 44.15,52.98 43.85,52.98 43.7,52.83 43.7,52.53 42.32,52.53 42.32,52.37 42.55,52.14 42.55,51.76 42.25,51.46 42.4,51.31 42.4,51 42.55,50.85 42.55,50.47 42.48,50.47 42.48,50.85 42.4,50.85 42.4,50.32 42.48,50.24 42.32,50.09 42.32,49.1 42.4,49.02 42.25,48.87 42.17,48.94 42.1,48.94 42.02,48.87 42.02,48.79 42.1,48.72 42.02,48.64 41.87,48.64 41.79,48.56 41.72,48.64 41.64,48.64 41.56,48.56 41.26,48.56 40.88,48.94 40.5,48.56 40.42,48.64 40.34,48.64 40.27,48.56 40.04,48.56 39.96,48.49 39.81,48.49 39.73,48.56 39.73,48.64 39.66,48.64 39.66,48.49 39.73,48.41 39.73,46.28 39.81,46.2 39.81,46.12 39.73,46.12 39.66,46.2 39.66,48.41 39.96,48.72 39.89,48.79 39.81,48.72 39.73,48.72 39.73,48.79 39.81,48.79 39.96,48.64 40.27,48.64 40.34,48.56 40.42,48.56 40.88,49.02 41.26,48.64 41.56,48.64 41.64,48.56 41.72,48.56 41.87,48.72 42.02,48.72 42.25,48.94 42.25,49.86 42.1,50.01 42.02,50.01 41.79,50.24 41.87,50.32 41.94,50.32 41.94,50.39 42.02,50.47 42.02,50.54 41.64,50.54 41.64,50.47 41.56,50.39 41.41,50.39 41.33,50.47 41.33,50.54 41.41,50.62 41.26,50.77 41.26,50.85 41.33,50.93 41.56,50.93 41.72,50.77 41.94,50.77 41.94,50.7 41.72,50.7 41.64,50.77 41.33,50.77 41.26,50.7 41.41,50.54 41.56,50.54 41.64,50.62 42.02,50.62 42.02,50.93 42.1,50.93 42.1,50.39 42.17,50.39 42.17,51.08 41.94,51.08 41.94,51.15 42.1,51.31 42.17,51.31 42.25,51.23 42.25,50.24 41.87,50.24 41.79,50.16 42.02,49.93 42.1,49.93 42.32,50.16 42.32,51.23 42.1,51.46 42.02,51.38 41.94,51.38 41.79,51.54 41.49,51.54 41.33,51.69 41.41,51.76 41.56,51.76 41.64,51.69 41.94,51.69 42.02,51.61 42.1,51.61 42.1,51.76 42.32,51.76 42.32,51.69 42.17,51.54 41.87,51.54 41.79,51.46 41.79,51.15 41.87,51.15 42.48,51.76 42.48,51.84 41.64,51.84 41.64,51.76 41.56,51.69 41.41,51.69 41.18,51.92 41.18,52.07 41.41,52.3 41.87,52.3 42.02,52.14 42.02,52.07 41.72,52.07 41.56,52.22 41.49,52.22 41.41,52.14 41.33,52.14 41.26,52.07 41.26,51.99 41.33,51.92 41.41,51.92 41.41,51.99 41.33,51.99 41.26,51.92 41.33,51.84 41.56,51.84 41.72,51.99 42.17,51.99 42.25,52.07 42.1,52.22 42.17,52.3 42.25,52.3 42.4,52.14 42.4,51.99 42.25,51.99 41.94,52.3 41.94,52.37 42.02,52.45 42.1,52.45 42.17,52.53 42.1,52.6 42.17,52.68 42.25,52.68 42.25,52.45 42.17,52.37 42.02,52.37 41.87,52.53 41.87,52.6 41.94,52.6 42.02,52.53 42.1,52.53 42.48,52.14 42.48,51.92 41.72,51.92 41.11,52.53 41.11,53.21 41.33,53.44 41.41,53.36 41.56,53.36 41.79,53.59 41.87,53.59 41.87,53.52 42.02,53.36 42.02,53.29 41.64,53.29 41.64,53.36 41.56,53.44 41.41,53.44 41.18,53.21 41.26,53.14 41.26,53.06 41.33,52.98 41.56,52.98 41.64,53.06 41.64,53.14 41.33,53.14 41.26,53.21 41.33,53.29 41.56,53.29 41.64,53.21 42.02,53.21 42.02,52.98 42.1,52.91 42.17,52.98 42.17,53.44 42.25,53.44 42.32,53.36 42.32,53.06 42.17,52.91 42.1,52.98 42.1,53.44 42.17,53.52 42.25,53.52 42.4,53.36 42.4,53.06 42.1,52.75 41.79,52.75 41.79,52.45 41.87,52.45 42.48,53.06 42.48,53.36 42.1,53.74 42.1,53.82 42.17,53.9 42.25,53.9 42.25,53.82 42.02,53.59 41.87,53.74 42.4,54.28 42.4,54.35 42.17,54.35 41.79,53.97 41.79,53.67 41.87,53.67 42.48,54.28 42.48,54.43 41.87,54.43 41.79,54.51 41.72,54.43 41.64,54.43 41.64,54.96 41.79,54.96 41.87,54.89 41.94,54.89 42.02,54.96 42.02,55.04 41.94,55.12 42.02,55.19 42.1,55.19 42.17,55.12 42.17,55.04 42.02,54.89 41.79,55.12 41.72,55.12 41.72,55.27 41.79,55.27 41.87,55.19 41.87,55.12 41.79,55.04 41.64,55.04 41.64,55.42 41.72,55.42 42.48,54.66 42.48,54.51 41.87,54.51 41.56,54.2 41.41,54.2 41.26,54.35 41.49,54.58 41.49,54.96 41.26,54.96 41.11,55.12 41.03,55.04 41.11,54.96 41.11,54.81 41.03,54.74 40.95,54.81 40.95,54.89 41.26,55.19 41.26,55.27 41.33,55.35 41.49,55.35 41.49,55.04 41.33,55.04 41.11,55.27 40.88,55.04 40.8,55.04 40.57,55.27 40.5,55.19 40.04,55.19 39.96,55.27 39.43,54.74 39.51,54.66 39.51,54.58 39.43,54.51 39.43,54.2 39.81,53.82 39.43,53.44 39.51,53.36 39.51,53.29 39.43,53.21 39.43,52.98 39.35,52.91 39.35,52.68 39.58,52.45 39.66,52.53 39.66,52.6 39.51,52.75 39.51,52.83 39.58,52.91 39.66,52.83 39.58,52.75 39.73,52.6 39.73,52.53 39.28,52.07 39.28,51.99 39.2,51.92 39.12,51.99 39.05,51.99 38.97,51.92 38.82,51.92 38.74,51.99 38.36,51.99 38.36,51.92 38.74,51.92 38.82,51.99 38.97,51.99 39.12,51.84 39.2,51.84 39.35,51.99 39.35,52.07 39.81,52.53 39.81,52.6 39.51,52.91 39.51,53.21 39.43,53.29 39.43,53.36 39.89,53.82 39.51,54.2 39.51,54.51 39.43,54.58 39.43,54.66 40.04,55.27 40.5,55.27 40.8,54.96 40.88,54.96 41.33,55.42 41.56,55.42 41.56,54.51 J4.9
  Top 0.152: v45.22,56.56 45.22,56.49 45.37,56.34 45.83,56.34 45.83,56.41 45.37,56.41 45.3,56.34 45.3,56.26 44.99,55.95 44.99,55.8 45.07,55.73 45.07,55.57 44.92,55.42 44.84,55.42 44.84,55.5 44.99,55.65 44.99,55.73 45.07,55.8 45.07,55.95 44.99,56.03 44.99,56.11 45.07,56.11 45.22,56.26 45.22,56.41 45.53,56.72 45.37,56.87 44.08,56.87 44.08,56.79 45.22,56.79 45.22,56.72 44.08,56.72 43.93,56.87 43.93,57.1 43.7,57.33 43.54,57.33 43.54,57.25 43.7,57.25 43.85,57.1 43.85,57.02 43.7,57.02 43.39,57.33 42.55,57.33 42.32,57.55 42.32,57.71 42.4,57.71 42.4,57.55 42.55,57.4 42.48,57.33 42.55,57.25 43.39,57.25 v43.39,55.35 | v47.35,43.92 47.35,44.22 45.83,44.22 45.83,43.53 45.75,43.53 45.53,43.31 45.53,43.23 45.6,43.23 45.6,43.31 45.75,43.46 45.83,43.46 45.91,43.53 45.91,44.14 47.28,44.14 47.28,44.07 47.13,43.92 47.35,43.69 47.51,43.69 48.04,44.22 52.69,44.22 52.69,44.14 48.04,44.14 47.96,44.22 47.43,44.22 47.43,44.14 47.89,44.14 48.19,43.84 48.19,43.38 47.43,42.62 45.53,42.62 45.53,41.63 45.6,41.63 45.6,42.54 45.68,42.54 45.68,41.63 45.53,41.48 45.3,41.48 44.99,41.17 44.99,38.05 45.07,38.05 45.07,39.27 45.14,39.34 45.14,39.5 45.07,39.57 45.07,40.49 45.14,40.56 45.14,40.79 45.07,40.87 45.07,41.17 45.3,41.4 45.37,41.4 45.45,41.32 45.45,38.35 44.99,37.9 44.99,34.24 45.07,34.24 45.07,35.46 45.14,35.53 45.14,35.69 45.07,35.76 45.07,36.68 45.14,36.75 45.14,36.98 45.07,37.06 45.07,37.9 45.37,37.9 45.83,37.44 48.65,37.44 48.8,37.29 48.8,36.6 48.73,36.6 48.73,37.29 48.8,37.36 48.88,37.36 49.18,37.67 49.34,37.67 49.41,37.59 49.79,37.59 49.79,37.67 49.41,37.67 49.34,37.59 49.18,37.59 49.11,37.67 49.03,37.67 49.03,37.59 48.88,37.44 48.73,37.44 48.65,37.36 48.65,36.6 48.73,36.52 48.8,36.52 48.88,36.6 49.18,36.3 49.34,36.3 49.41,36.37 49.56,36.37 49.64,36.3 49.64,36.22 49.56,36.22 49.49,36.3 49.41,36.3 49.34,36.37 49.18,36.37 49.11,36.3 49.03,36.3 49.03,36.37 48.95,36.45 48.88,36.45 48.88,36.37 49.11,36.14 49.79,36.14 50.25,35.69 50.33,35.69 50.4,35.76 50.63,35.76 50.71,35.69 50.71,35.61 50.63,35.61 50.55,35.69 50.4,35.69 50.33,35.76 50.25,35.76 50.17,35.69 50.1,35.69 50.02,35.76 50.02,35.84 49.79,36.07 49.72,36.07 49.72,35.99 50.17,35.53 50.86,35.53 56.57,29.82 56.57,29.74 56.5,29.74 56.42,29.82 56.42,29.89 50.86,35.46 50.78,35.46 50.78,35.38 51.39,34.77 51.47,34.77 56.35,29.89 56.35,29.82 56.57,29.59 56.57,28.98 56.04,28.98 56.04,29.06 56.5,29.06 56.5,29.59 56.42,29.59 55.81,28.98 54.75,28.98 54.75,29.06 55.81,29.06 55.89,28.98 55.96,29.06 55.89,29.13 54.75,29.13 54.59,28.98 53.45,28.98 53.45,29.06 54.59,29.06 54.59,29.13 53.45,29.13 53.3,28.98 52.15,28.98 52.15,29.67 52.23,29.67 52.23,29.06 53.3,29.06 53.3,29.13 52.69,29.74 52,29.74 51.77,29.97 51.62,29.97 51.55,29.89 51.16,29.89 51.16,29.97 51.55,29.97 51.62,29.89 51.77,29.89 51.85,29.97 51.93,29.97 51.93,29.89 52,29.82 52.08,29.82 52.08,29.89 51.93,30.05 51.16,30.05 51.09,29.97 51.09,29.89 51.16,29.82 50.86,29.51 50.86,29.36 50.94,29.28 50.94,28.98 50.86,28.98 50.86,29.28 50.94,29.36 50.94,29.51 50.86,29.59 50.86,29.67 50.94,29.67 51.01,29.74 51.01,29.82 50.94,29.82 50.78,29.67 50.78,28.98 49.64,28.98 49.64,29.06 50.71,29.06 50.71,29.13 49.64,29.13 49.49,28.98 48.42,28.98 48.42,29.06 49.49,29.06 49.49,29.13 48.42,29.13 48.27,28.98 47.13,28.98 47.13,29.06 48.27,29.06 48.27,29.13 47.13,29.13 46.97,28.98 45.83,28.98 45.83,29.06 46.97,29.06 46.97,29.13 45.83,29.13 45.68,28.98 44.99,28.98 44.99,29.21 45.07,29.21 45.07,29.06 45.68,29.06 45.68,29.13 45.53,29.28 44.84,29.28 44.61,29.51 44.46,29.51 44.38,29.44 44,29.44 44,29.51 44.38,29.51 44.46,29.44 44.61,29.44 44.69,29.51 44.76,29.51 44.76,29.44 44.84,29.36 44.92,29.36 44.92,30.35 44.76,30.5 44.69,30.5 44.69,30.43 44.76,30.43 45.07,30.73 45.07,30.81 44.99,30.81 44.99,30.73 44.84,30.58 44.92,30.5 45.14,30.73 45.14,30.81 44.99,30.96 44.99,34.09 45.07,34.09 45.07,33.4 45.14,33.32 45.14,33.17 45.07,33.09 45.07,32.1 45.14,32.03 45.14,31.88 45.07,31.8 45.07,30.96 45.14,30.88 45.22,30.88 45.3,30.81 45.3,30.66 45.07,30.43 44.92,30.43 44.84,30.35 44.69,30.35 44.53,30.5 43.01,30.5 42.86,30.66 42.86,30.81 42.93,30.81 42.93,30.66 43.01,30.58 42.93,30.5 43.01,30.43 44.53,30.43 44.53,30.2 43.85,29.51 44,29.36 43.7,29.06 43.7,28.9 43.77,28.83 43.77,28.45 43.7,28.45 43.7,28.83 43.77,28.9 43.77,29.06 43.7,29.13 43.7,29.21 43.77,29.21 43.85,29.28 43.85,29.36 43.77,29.36 43.62,29.21 43.62,28.45 43.7,28.37 43.77,28.37 43.85,28.45 44.15,28.14 44.31,28.14 44.38,28.22 44.53,28.22 44.61,28.14 44.61,28.07 44.53,28.07 44.46,28.14 44.38,28.14 44.31,28.22 44.15,28.22 44.08,28.14 44,28.14 44,28.22 43.93,28.29 43.85,28.29 43.85,28.22 44.08,27.99 44.61,27.99 44.69,27.91 44.69,27 44.84,26.85 45.14,26.85 45.14,26.92 44.84,26.92 44.76,27 44.69,26.92 44.61,27 44.61,27.91 44.53,27.91 44.53,27 44.46,26.92 44.69,26.69 45.14,26.69 45.45,26.39 45.3,26.24 45.3,26.08 45.37,26.01 45.37,25.63 45.3,25.63 45.3,26.01 45.37,26.08 45.37,26.24 45.3,26.31 45.3,26.47 45.14,26.62 45.07,26.62 45.07,25.78 45.3,25.55 45.37,25.55 45.45,25.63 45.75,25.32 45.91,25.32 45.98,25.4 46.36,25.4 46.36,25.32 45.98,25.32 45.91,25.4 45.75,25.4 45.68,25.32 45.6,25.32 45.6,25.4 45.53,25.47 45.45,25.47 45.45,24.71 43.77,24.71 43.7,24.79 43.7,24.87 43.77,24.87 43.85,24.79 45.37,24.79 45.37,24.87 43.85,24.87 43.77,24.94 43.54,24.94 39.35,29.13 39.35,29.21 39.43,29.21 39.58,29.06 39.58,28.98 43.54,25.02 43.62,25.02 43.62,25.09 43.01,25.7 42.93,25.7 39.66,28.98 39.66,29.06 39.35,29.36 39.35,29.97 39.2,30.12 38.9,30.12 38.9,30.05 39.2,30.05 39.28,29.97 39.35,30.05 39.43,29.97 39.43,29.36 39.51,29.36 39.58,29.44 39.58,30.05 39.35,30.28 38.9,30.28 38.9,34.92 38.97,34.92 38.97,30.35 39.05,30.35 39.05,30.5 41.87,33.32 41.03,34.16 41.03,34.24 41.11,34.24 41.11,34.16 41.03,34.09 41.03,34.01 41.11,33.93 41.18,33.93 42.93,32.18 42.93,31.65 42.86,31.65 42.86,32.18 42.78,32.26 42.86,32.33 41.94,33.25 41.87,33.17 42.71,32.33 42.71,31.72 42.93,31.49 42.93,30.96 42.86,30.96 42.86,31.49 42.78,31.49 42.78,30.58 42.4,30.2 42.4,30.05 v42.25,29.89